# Altium PCB BatteryVCsmooth.PcbDoc
Units mm, origin at the board's own origin, x right, y up, seen from the top; angles counter-clockwise.
Board outline 95.06 x 95.03 mm, 2 copper layers (Top Layer, Bottom Layer); 23 components, 15 nets, 61 pads, 0 vias.
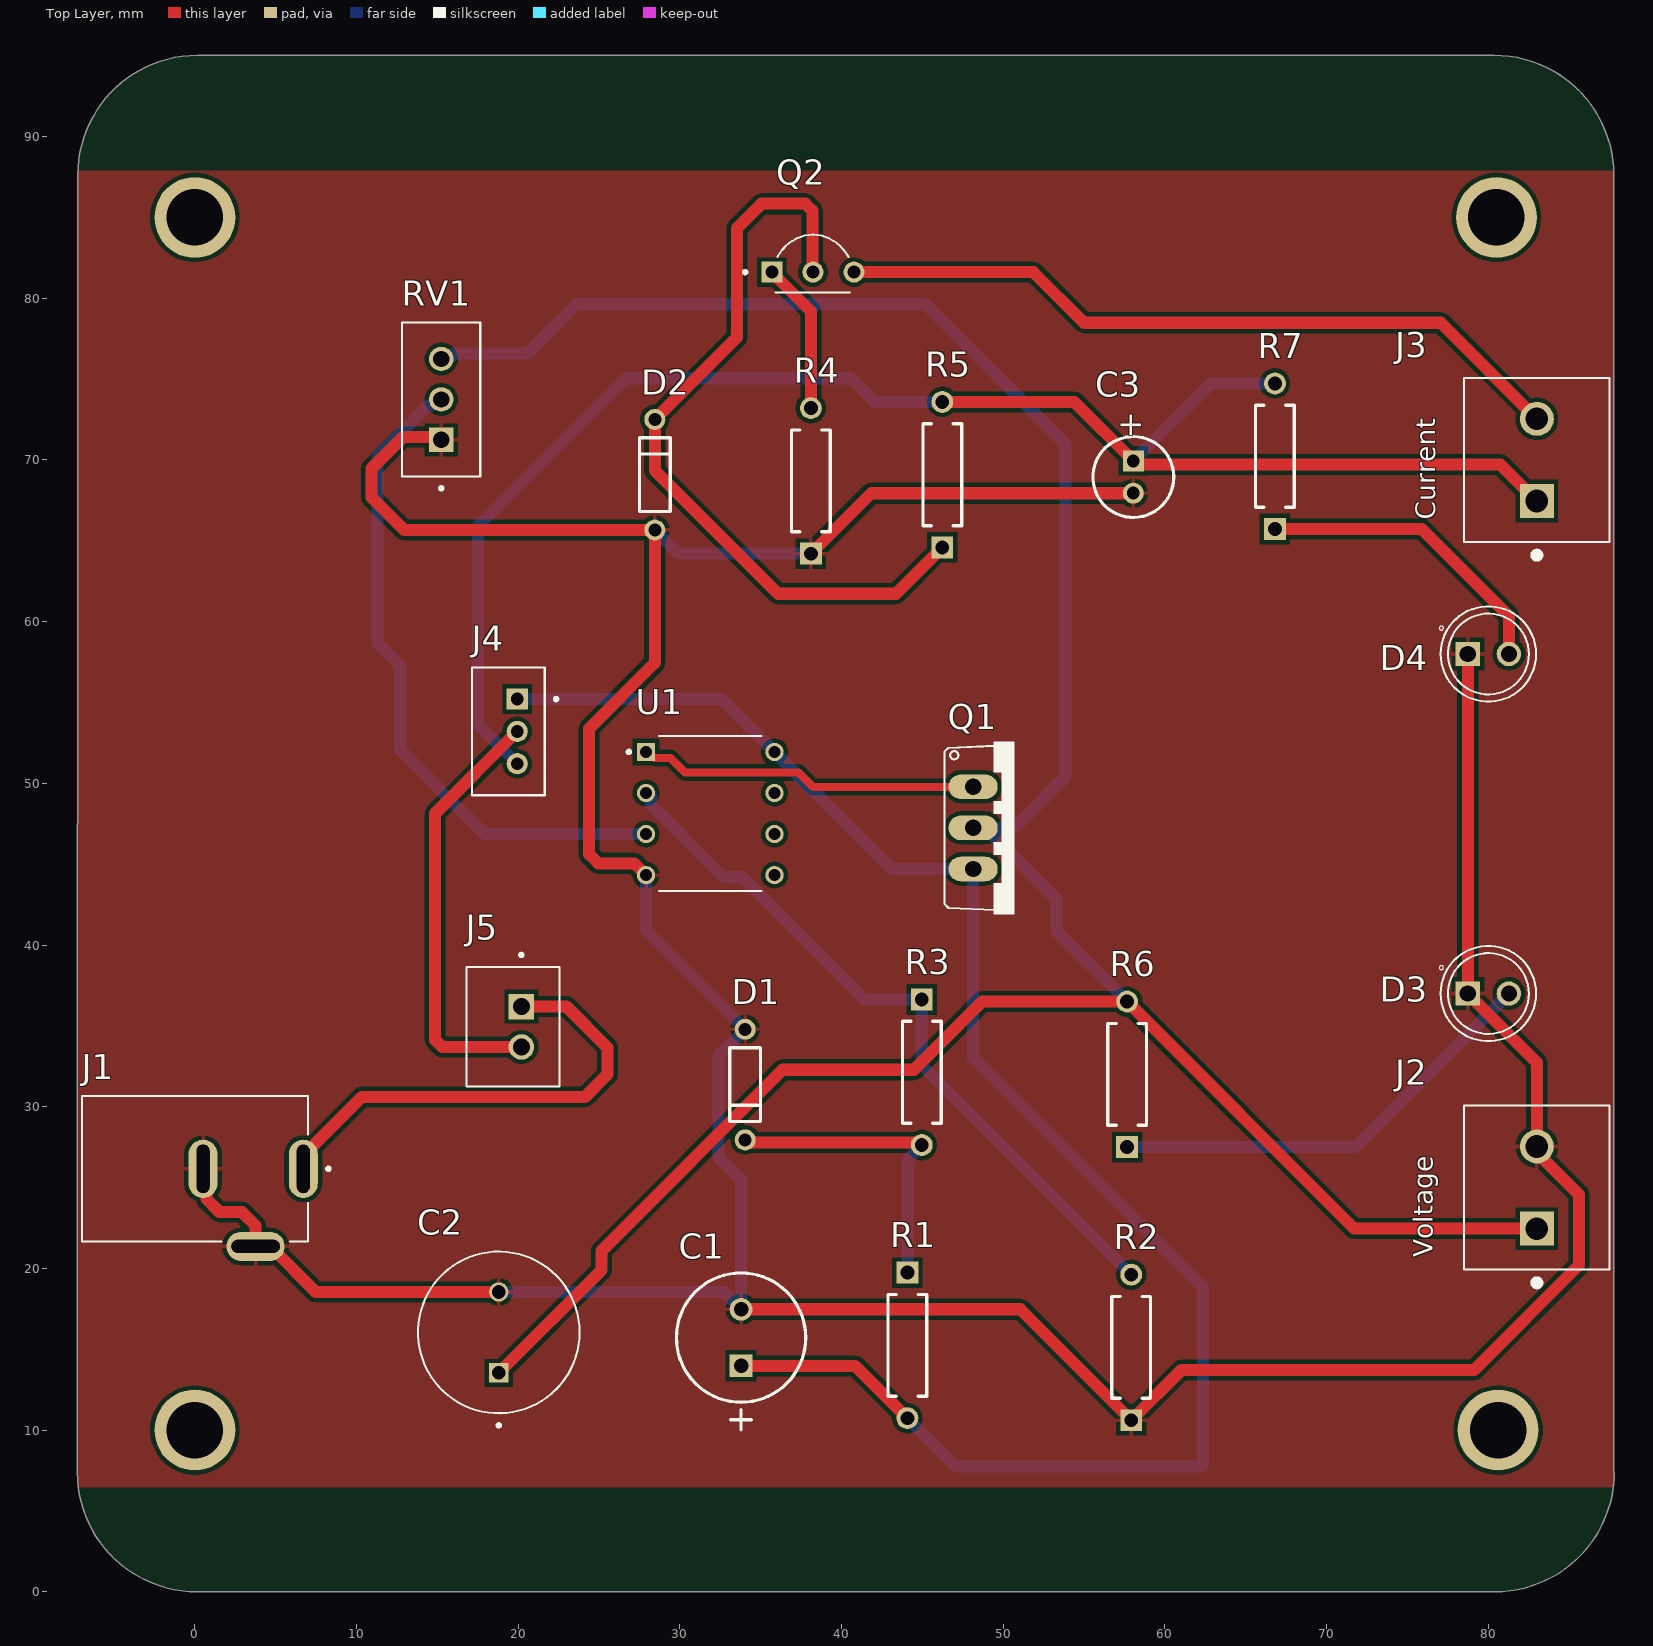
[diagram p0: Top Layer view]
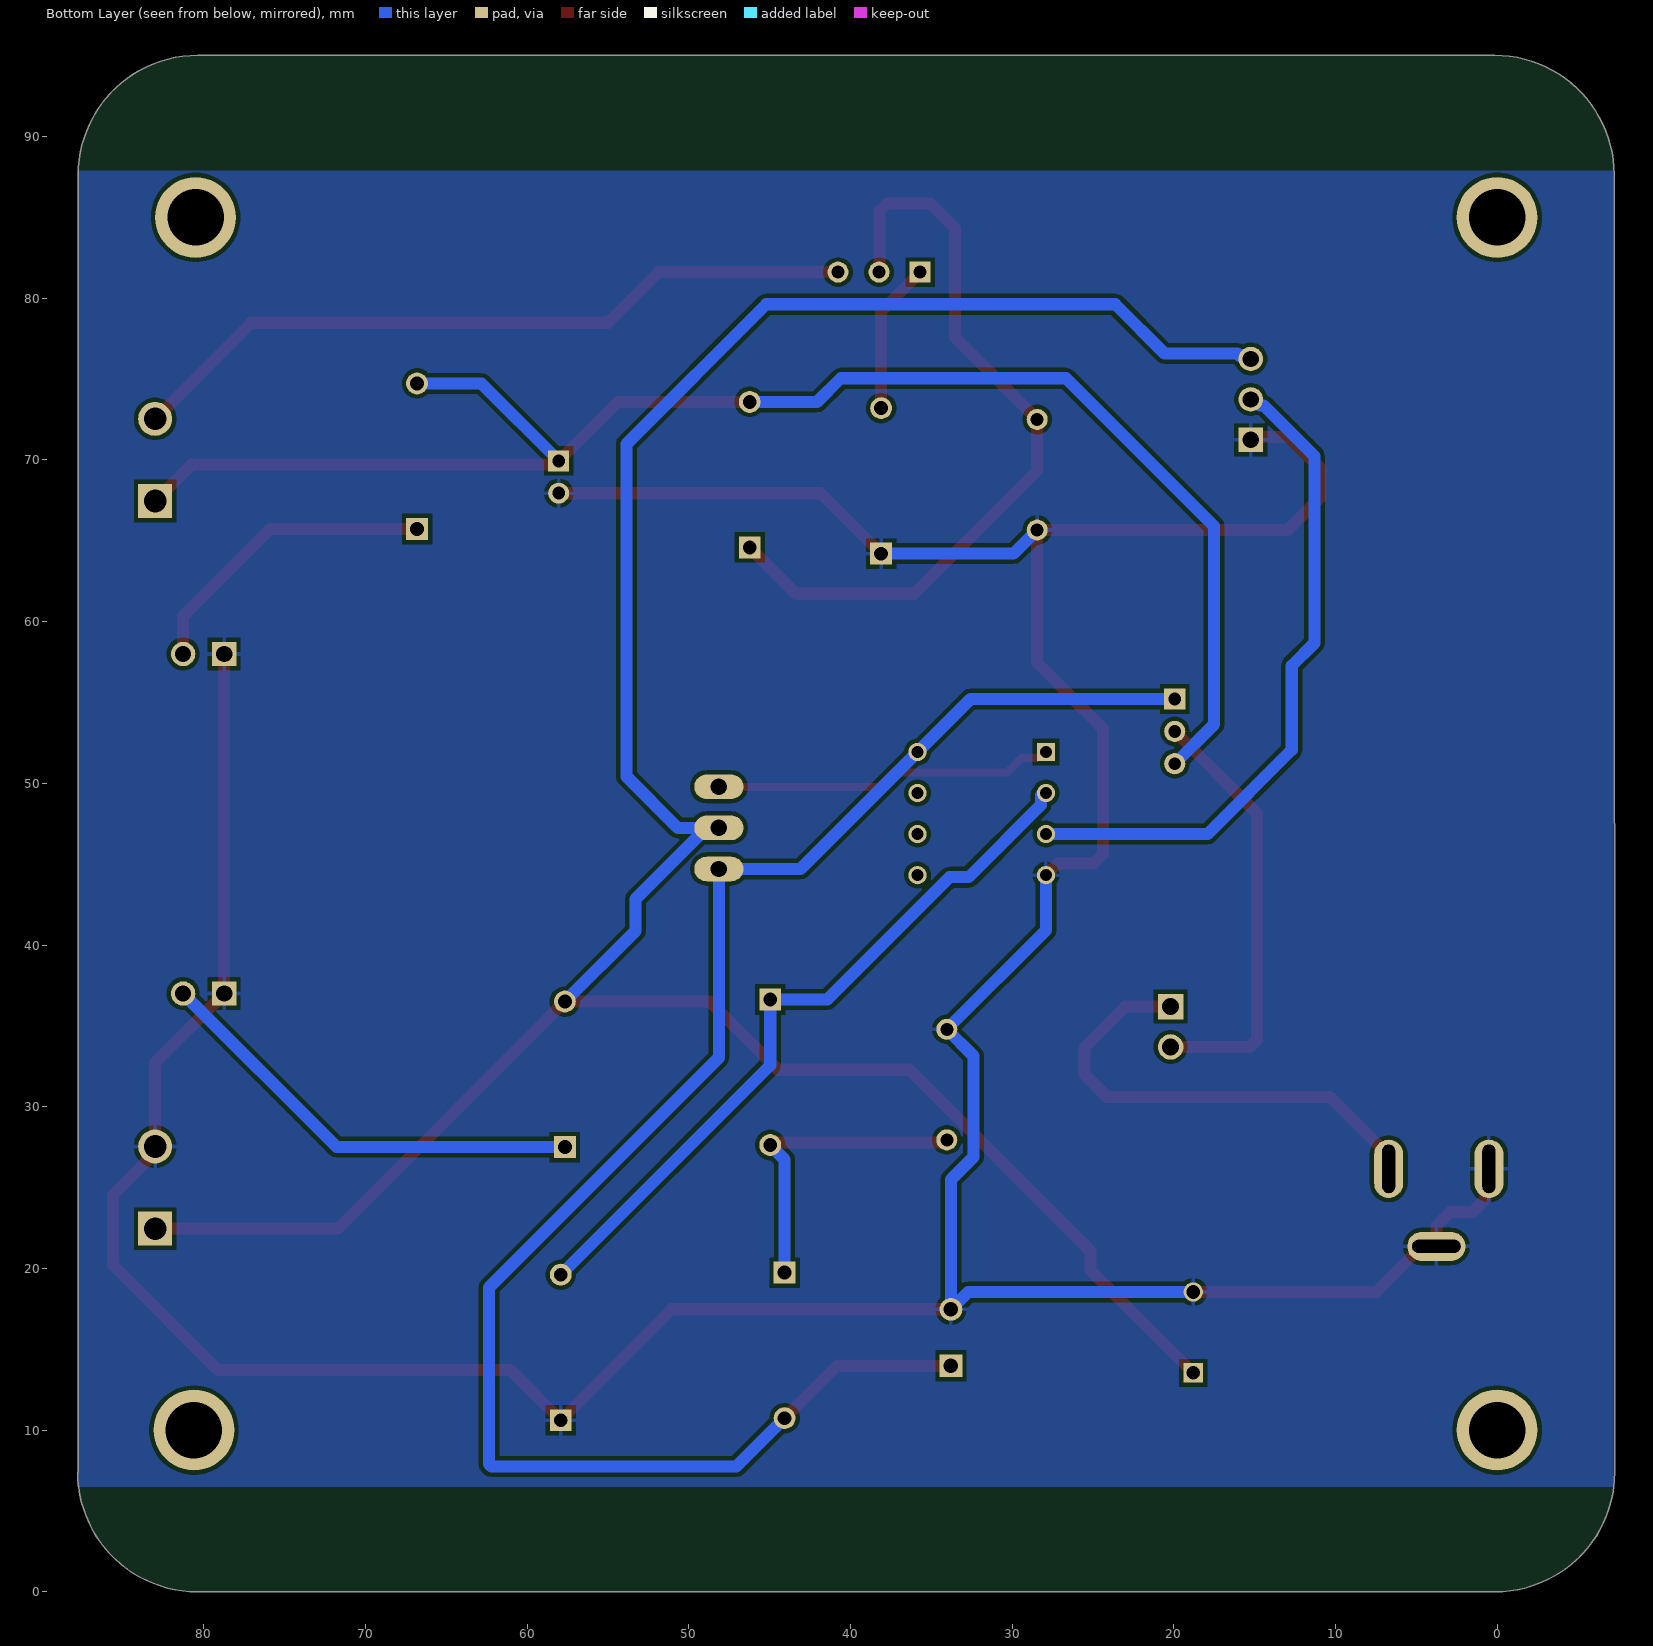
[diagram p1: Bottom Layer view, seen from below]

## Layer stack, top to bottom
Top Solder: solder mask 0.0102, Solder Resist, Dk 3.5
Top Layer: signal copper 0.0356
Dielectric 1: dielectric 0.32, FR-4, Dk 4.8
Bottom Layer: signal copper 0.0356
Bottom Solder: solder mask 0.0102, Solder Resist, Dk 3.5

## Board outline
0.127,0 cw(c0.127,7.399) -7.272,7.399 -7.239,87.63 cw(c0.16,87.63) 0.16,95.029 80.358,95.029 cw(c80.358,87.63) 87.757,87.63 87.757,7.399 87.79,7.399 cw(c80.391,7.399) 80.391,0

## Design rules (kind name [scope] priority, off if disabled: settings)
Clearance Clearance_1 [OnMid vs OnMid] p1: gap=0.254 ignorepadtopadclearanceinfootprint=FALSE sourcerule=36 cellrowname=All cellrowtype=0 cellcolname=All cellcoltype=0 innerlayers=TRUE
Clearance Clearance_2 [(ExistsOnLayer('Top Layer') Or ExistsOnLayer('Bottom Layer')) vs (ExistsOnLayer('Top Layer') Or ExistsOnLayer('Bottom Layer'))] p2: gap=0.254 ignorepadtopadclearanceinfootprint=FALSE sourcerule=36 cellrowname=All cellrowtype=0 cellcolname=All cellcoltype=0 outerlayers=TRUE
Clearance [All] p3: gap=0.254 ignorepadtopadclearanceinfootprint=FALSE ismatrix=TRUE
HoleSize [All] p1: absolutevalues=TRUE maxlimit=10 minlimit=0.025 maxpercent=80.000 minpercent=20.000
PolygonConnect [All] p1: connectstyle=Relief reliefconductorwidth=0.254 reliefentries=4 polygonreliefangle="90 Angle" airgapwidth=0.254
RoutingVias [All] p1: holewidth=0.711 width=1.27 viastyle="Through Hole" minholewidth=0.711 minwidth=1.27 maxholewidth=0.711 maxwidth=1.27
SilkToSolderMaskClearance [IsPad] p1: minsilkscreentomaskgap=0.1 clearancetoexposedcopper=TRUE
SolderMaskExpansion [All] p1: expansion=0.102 istentingtop=FALSE
Width MaxMinWidth_1 [All] p1: maxlimit=2 minlimit=0.254 preferedwidth=0.254 minimp=50.000000 maximp=50.000000 favimp=50.000000
28 further rules are at their usual default settings.

## Components (designator, comment, footprint, x,y, rotation, side; value= is the part's Value field where it differs from the comment)
C1 "ECA1HM101" CAPPR65-350-1150X800X1250 33.782,15.72 r90 top value=100µF
C2 "1000uF 16V" CAPPRD500W60D1000H2000 18.796,16.042 r90 top
C3 "ECA-1HHG010" CAPPR55-200-1100X500X1200 58.039,68.945 r270 top value=1µF
D1 "6.2V" FAIR-DO-35-2 34.036,31.369 r270 top
D2 "2.4V" FAIR-DO-35-2 28.448,69.088 r90 top
D3 "LED" LED_WP7113ID 80,37 r0 top
D4 "LED" LED_WP7113ID 80,58 r0 top
J1 "9V" CUI_PJ-035C 6.708,26.162 r270 top
J2 "Constant Voltage" TE_282841-2 83,25 r90 top
J3 "Constant Current" TE_282841-2 83,70 r90 top
J4 "Switch" JST_B3B-PH-K-S 19.389,53.213 r90 top
J5 "Power Switch" JST_B2B-XH-A(LF)(SN) 19.668,34.945 r90 top
Q1 "IRF9530N" TO220V 50.673,47.244 r270 top
Q2 "2N2222A" TO92254P470H750-3 38.227,83.947 r0 top
R1 "MFR-25FBF52-270" RESA60-630X240 44.069,15.24 r270 top value=270
R2 "MFR-25FBF52-10k" RESA60-630X240 57.912,15.113 r90 top value=10k
R3 "MFR-25FBF52-10k" RESA60-630X240 44.958,32.131 r270 top value=10k
R4 "MFR-25FBF52-46" RESA60-630X240 38.1,68.707 r90 top value=46
R5 "MFR-25FBF52-220" RESA60-630X240 46.228,69.088 r90 top value=220
R6 "MFR-25FBF52-1k" RESA60-630X240 57.658,32.004 r90 top value=1k
R7 "MFR-25FBF52-1k" RESA60-630X240 66.802,70.231 r90 top value=1K
RV1 "" TRIM_PV36W254C01B00 15.24,73.747 r90 top
U1 "LM358N/NOPB" DIP794W45P254L959H508Q8 31.877,48.133 r0 top

## Footprints (in the part's own frame and the unit in brackets; to place one, negate y for a bottom-side part, rotate by r counter-clockwise, add the part's x,y. Pads: shape width x height; smd on the part's side, far side on the other; paste and mask are expansions set on the pad)
CAPPR55-200-1100X500X1200 [mm] "THD, 2-Leads, Dia 5mm, Pin Spacing 2mm"
  rect 1.3x1.3 hole 0.8: 1(-1,0)
  round 1.3 hole 0.8: 2(1,0)
  silkscreen extent -2.5,-2.5 2.5,2.5, body extent -2.5,-2.5 2.45,2.5, height 12
CAPPR65-350-1150X800X1250 [mm] "THD, 2-Leads, Dia 8mm, Pin Spacing 3.5mm"
  rect 1.4x1.4 hole 0.9: 1(-1.75,0)
  round 1.4 hole 0.9: 2(1.75,0)
  silkscreen extent -5.71,-4 4,4, body extent -4,-4 3.95,4, height 12.5
CAPPRD500W60D1000H2000 [mm]
  round 1.2 hole 0.85: N(2.5,0)
  rect 1.2x1.2 hole 0.85: P(-2.5,0)
  silkscreen extent -5.85,-5 5,5, body extent -5,-5 5,5, height 20
CUI_PJ-035C [mm]
  oval 3.6x1.8 hole 0.8 slot 3 at 0 deg: 1(0,0) 2(0,-6.2)
  oval 1.8x3.6 hole 0.8 slot 3 at 90 deg: 3(4.8,-2.95)
  silkscreen extent -4.5,-13.7 4.5,1.65
DIP794W45P254L959H508Q8 [mm]
  rect 1.13x1.13 / inner round 1.13 / far side rect 1.13x1.13 hole 0.74: 1(-3.97,3.81)
  round 1.13 hole 0.74: 2(-3.97,1.27) 3(-3.97,-1.27) 4(-3.97,-3.81) 5(3.97,-3.81) 6(3.97,-1.27) 7(3.97,1.27) 8(3.97,3.81)
  silkscreen extent -5.13,-4.79 3.17,4.79, body extent -3.81,-4.88 3.81,4.88, height 4.96
FAIR-DO-35-2 [mm] "TH, 2-Leads, Dia 1.91mm"
  round 1.3 hole 0.8: 1(-3.42,0) 2(3.42,0)
  silkscreen extent -2.28,-0.95 2.28,0.95, body extent -3.7,-0.95 3.7,0.95, height 1.91
JST_B2B-XH-A(LF)(SN) [mm]
  rect 1.575x1.575 / inner round 1.575 / far side rect 1.575x1.575 hole 1.05: 1(1.25,-0.525)
  round 1.575 hole 1.05: 2(-1.25,-0.525)
  silkscreen extent -3.7,-2.88 4.54,2.88, body extent -3.7,-2.88 3.7,2.88, height 7
JST_B3B-PH-K-S [mm]
  rect 1.308x1.308 / inner round 1.308 / far side rect 1.308x1.308 hole 0.8: 1(2,-0.55)
  round 1.308 hole 0.8: 2(0,-0.55) 3(-2,-0.55)
  silkscreen extent -3.95,-3.05 3.95,2.25
LED_WP7113ID [mm]
  round 1.508 hole 1: A(1.27,0)
  rect 1.508x1.508 / inner round 1.508 / far side rect 1.508x1.508 hole 1: C(-1.27,0)
  silkscreen extent -3.03,-2.95 2.95,2.95, body extent -2.5,-2.95 2.95,2.95, height 9.6
RESA60-630X240 [mm] "Axial Resistor, 2-Leads, Dia 2.4mm, Body Length 6.3mm"
  rect 1.35x1.35 hole 0.85: 1(-4.5,0)
  round 1.35 hole 0.85: 2(4.5,0)
  silkscreen extent -3.15,-1.2 3.15,1.2, body extent -4.77,-1.19 4.77,1.2, height 2.4
TE_282841-2 [mm]
  rect 2.1x2.1 / inner round 2.1 / far side rect 2.1x2.1 hole 1.4: 1(-2.54,0)
  round 2.1 hole 1.4: 2(2.54,0)
  silkscreen extent -6.09,-4.5 5.08,4.5, body extent -5.08,0 5.58,9, height 15.2
TO220V [mil]
  oval 60x120 hole 40: 1(-100,-100) 2(0,-100) 3(100,-100)
  silkscreen extent -210,-170 210,0, body extent -105,-56 305,120, height 760
TO92254P470H750-3 [mm]
  rect 1.298x1.298 / inner round 1.298 / far side rect 1.298x1.298 hole 0.79: 1(-2.54,-2.33)
  round 1.298 hole 0.79: 2(0,-2.33) 3(2.54,-2.33)
  silkscreen extent -4.29,-3.6 2.3,0, body extent -2.74,-4.6 2.74,12.5, height 2.3
TRIM_PV36W254C01B00 [mm]
  rect 1.508x1.508 / inner round 1.508 / far side rect 1.508x1.508 hole 1: 1(-2.5,0)
  round 1.508 hole 1: 2(0,0) 3(2.5,0)
  silkscreen extent -5.6,-2.41 4.76,2.42, body extent -4.76,-2.41 4.76,2.42, height 11.55

## Part data
C1: library part CMP-001-00026-7, "Aluminum Electrolytic Capacitor, 100 uF, +/- 20%, 50 V, -40 to 85 degC, 2-Pin THD, RoHS, Bulk", Capacitor Type=Electrolytic, Case/Package=Radial, Manufacturer=Panasonic, Max Operating Temperature=85°C, Min Operating Temperature=-40°C, Package Description="2-Pin Radial Lead, Dia 8 mm, Height 12.5 mm", Package Quantity=200, Package Reference=CAPPR65-350-1150X800X1250, Ripple Current=250mA, Tolerance=20%, Voltage Rating=50V, Datasheet URL=https://industrial.panasonic.com/cdbs/www-data/pdf/RDF0000/ABA0000C1218.pdf, Datasheet Version="Rev. 05, 10/2016", Diameter=8mm, Lead Pitch=3.5mm, Manufacturer URL=http://www.panasonic.com/, Mounting Technology=TH, Packaging=Bulk, Pins=2, Ripple Current (AC)=250mA, RoHS Compliant=True
C2: library part EEUEB1C102B, "1000F 16V Aluminum Electrolytic Capacitors Radial, Can 10000 Hrs @ 105C", Package="RADIAL-2 Panasonic", Availability="In Stock", Check_prices=https://www.snapeda.com/parts/EEU-EB1C102B/Panasonic/view-part/2309636/?ref=eda, MF=Panasonic, MP=EEU-EB1C102B, Price=None, Purchase-URL=https://pricing.snapeda.com/search/part/EEU-EB1C102B/?ref=eda, SnapEDA_Link=https://www.snapeda.com/parts/EEU-EB1C102B/Panasonic/view-part/2309636/?ref=snap
C3: library part CMP-001-00024-7, "Aluminum Electrolytic Capacitor, 1 uF, +/- 20%, 50 V, -55 to 105 degC, 2-Pin THD, RoHS, Bulk", Capacitor Type=Electrolytic, Case/Package=Radial, Manufacturer=Panasonic, Max Operating Temperature=105°C, Min Operating Temperature=-55°C, Package Description="2-Pin Radial Lead, Dia 5 mm, Height 12 mm", Package Quantity=200, Package Reference=CAPPR55-200-1100X500X1200, Ripple Current=10mA, Tolerance=20%, Voltage Rating=50V, Datasheet URL=https://datasheet.ciiva.com/7275/94060-7275472.pdf, Datasheet Version=Mar-05, Diameter=5mm, Lead Pitch=2mm, Manufacturer URL=http://www.panasonic.com/, Mounting Technology=TH, Packaging=Bulk, Pins=2, Ripple Current (AC)=10mA, RoHS Compliant=True
D1: library part CMP-004-00021-2, "Zener Diode, 6.1 V, 5 mA, -65 to 200 degC, 2-Pin DO-35, RoHS, Bulk", Case/Package=DO-35-2, Forward Voltage=1.5V, Manufacturer="Fairchild Semiconductor", Max Operating Temperature=200°C, Min Operating Temperature=-65°C, Package Description="2-Pin Through Hole Diode, Dia 1.72 mm, Body Length 3.805 mm", Package Quantity=1000, Power=500mW, Tolerance=6%, Datasheet URL=https://www.fairchildsemi.com/datasheets/BZ/BZX79C3V6.pdf, Datasheet Version="Rev. C1, 07/2007", Impedance=90Ohm, Manufacturer URL=https://www.fairchildsemi.com/, Mounting Technology=TH, Package Reference=DO-35-2, Package URL=https://www.fairchildsemi.com/package-drawings/DO/DO35A.pdf, Packaging=Bulk, Pins=2, RoHS Compliant=True
D2: library part CMP-004-00021-2, "Zener Diode, 2.4 V, 5 mA, -65 to 200 degC, 2-Pin DO-35, RoHS, Bulk", Case/Package=DO-35-2, Forward Voltage=1.5V, Manufacturer="Fairchild Semiconductor", Max Operating Temperature=200°C, Min Operating Temperature=-65°C, Package Description="2-Pin Through Hole Diode, Dia 1.72 mm, Body Length 3.805 mm", Package Quantity=1000, Power=500mW, Tolerance=6%, Datasheet URL=https://www.fairchildsemi.com/datasheets/BZ/BZX79C3V6.pdf, Datasheet Version="Rev. C1, 07/2007", Impedance=90Ohm, Manufacturer URL=https://www.fairchildsemi.com/, Mounting Technology=TH, Package Reference=DO-35-2, Package URL=https://www.fairchildsemi.com/package-drawings/DO/DO35A.pdf, Packaging=Bulk, Pins=2, RoHS Compliant=True
D3 D4: library part WP7113ID, "Red 617nm LED Indication - Discrete 2V Radial", Package="Radial Kingbright", Availability="In Stock", Check_prices=https://www.snapeda.com/parts/WP7113ID/Kingbright/view-part/?ref=eda, MF=Kingbright, MP=WP7113ID, Price=None, Purchase-URL=https://pricing.snapeda.com/search/part/WP7113ID/?ref=eda, SnapEDA_Link=https://www.snapeda.com/parts/WP7113ID/Kingbright/view-part/?ref=snap
J1: library part PJ-035C, Package=None, Availability=Unavailable, MF="{'manufacturer': u'CUI Devices'}", MP=PJ-035C, Price=None
J2 J3: library part 282841-2, "Conn Terminal Block 2 POS 5.08mm Solder ST Thru-Hole 17.5A/Contact", Package=None, Availability="In Stock", Check_prices=https://www.snapeda.com/parts/282841-2/TE+Connectivity+AMP+Connectors/view-part/?ref=eda, EU_RoHS_Compliance="Compliant with Exemptions", MF="TE Connectivity", MP=282841-2, Price=None, Purchase-URL=https://pricing.snapeda.com/search/part/282841-2/?ref=eda, SnapEDA_Link=https://www.snapeda.com/parts/282841-2/TE+Connectivity+AMP+Connectors/view-part/?ref=snap
J4: library part B3B-PH-K-S, Package=None, Availability=Unavailable, MF="{'manufacturer': u'JST Sales America Inc.'}", MP=B3B-PH-K-S, Price=None
J5: library part B2B-XH-A(LF)(SN), "Connector Header Through Hole 2 position 0.098 (2.50mm)", Package=None, Check_prices=https://www.snapeda.com/parts/B2B-XH-A(LF)(SN)/JST+Sales+America+Inc./view-part/?ref=eda, MF="JST Sales America Inc.", MP=B2B-XH-A(LF)(SN), SnapEDA_Link=https://www.snapeda.com/parts/B2B-XH-A(LF)(SN)/JST+Sales+America+Inc./view-part/?ref=snap
Q1: library part IRF9530NPBF, "Canal P 100 V 14A (Tc) 79W (Tc) Orificio pasante TO-220AB", Package="TO-220 Infineon", Check_prices=https://www.snapeda.com/parts/IRF9530NPBF/Infineon+Technologies/view-part/?ref=eda, Digi-Key_Part_Number=IRF9530NPBF-ND, MF=Infineon, MP=IRF9530NPBF, Purchase-URL=https://pricing.snapeda.com/search/part/IRF9530NPBF/?ref=eda, SnapEDA_Link=https://www.snapeda.com/parts/IRF9530NPBF/Infineon+Technologies/view-part/?ref=snap
Q2: "Bipolar (BJT) Transistor NPN 40 V 600 mA 250MHz 625 mW Through Hole TO-92", Package="TO-92-3 Diotec", Availability="In Stock", Check_prices=https://www.snapeda.com/parts/2N2222A/Diotec/view-part/?ref=eda, MF="Diotec Semiconductor", MP=2N2222A, Price=None, Purchase-URL=https://pricing.snapeda.com/search/part/2N2222A/?ref=eda, SnapEDA_Link=https://www.snapeda.com/parts/2N2222A/Diotec/view-part/?ref=snap
R1: library part CMP-009-00045-4, "Axial Resistor, 270Ohm, +/- 1%, 0.25 W, -55 to 155 degC, 2-Pin THD, RoHS, Bulk", Case/Package=Axial, Manufacturer=Yageo, Max Operating Temperature=155°C, Min Operating Temperature=-55°C, Package Description="2-Pin Axial Lead, Dia 2.4 mm, Body Length 6.3 mm", Package Quantity=200, Package Reference=MFR-25, Power=250mW, Tolerance=1%, Voltage Rating=250V, Datasheet URL=http://www.yageo.com/documents/recent/Yageo%20LR_MFR_2013.pdf, Datasheet Version=Apr-13, Manufacturer URL=http://www.yageo.com/, Mounting Technology=TH, Packaging=Bulk, RoHS Compliant=True
R2 R3: library part CMP-009-00045-4, "Axial Resistor, 10kOhm, +/- 1%, 0.25 W, -55 to 155 degC, 2-Pin THD, RoHS, Bulk", Case/Package=Axial, Manufacturer=Yageo, Max Operating Temperature=155°C, Min Operating Temperature=-55°C, Package Description="2-Pin Axial Lead, Dia 2.4 mm, Body Length 6.3 mm", Package Quantity=200, Package Reference=MFR-25, Power=250mW, Tolerance=1%, Voltage Rating=250V, Datasheet URL=http://www.yageo.com/documents/recent/Yageo%20LR_MFR_2013.pdf, Datasheet Version=Apr-13, Manufacturer URL=http://www.yageo.com/, Mounting Technology=TH, Packaging=Bulk, RoHS Compliant=True
R4: library part CMP-009-00045-4, "Axial Resistor, 46Ohm, +/- 1%, 0.25 W, -55 to 155 degC, 2-Pin THD, RoHS, Bulk", Case/Package=Axial, Manufacturer=Yageo, Max Operating Temperature=155°C, Min Operating Temperature=-55°C, Package Description="2-Pin Axial Lead, Dia 2.4 mm, Body Length 6.3 mm", Package Quantity=200, Package Reference=MFR-25, Power=250mW, Tolerance=1%, Voltage Rating=250V, Datasheet URL=http://www.yageo.com/documents/recent/Yageo%20LR_MFR_2013.pdf, Datasheet Version=Apr-13, Manufacturer URL=http://www.yageo.com/, Mounting Technology=TH, Packaging=Bulk, RoHS Compliant=True
R5: library part CMP-009-00045-4, "Axial Resistor, 220Ohm, +/- 1%, 0.25 W, -55 to 155 degC, 2-Pin THD, RoHS, Bulk", Case/Package=Axial, Manufacturer=Yageo, Max Operating Temperature=155°C, Min Operating Temperature=-55°C, Package Description="2-Pin Axial Lead, Dia 2.4 mm, Body Length 6.3 mm", Package Quantity=200, Package Reference=MFR-25, Power=250mW, Tolerance=1%, Voltage Rating=250V, Datasheet URL=http://www.yageo.com/documents/recent/Yageo%20LR_MFR_2013.pdf, Datasheet Version=Apr-13, Manufacturer URL=http://www.yageo.com/, Mounting Technology=TH, Packaging=Bulk, RoHS Compliant=True
R6 R7: library part CMP-009-00045-4, "Axial Resistor, 1kOhm, +/- 1%, 0.25 W, -55 to 155 degC, 2-Pin THD, RoHS, Bulk", Case/Package=Axial, Manufacturer=Yageo, Max Operating Temperature=155°C, Min Operating Temperature=-55°C, Package Description="2-Pin Axial Lead, Dia 2.4 mm, Body Length 6.3 mm", Package Quantity=200, Package Reference=MFR-25, Power=250mW, Tolerance=1%, Voltage Rating=250V, Datasheet URL=http://www.yageo.com/documents/recent/Yageo%20LR_MFR_2013.pdf, Datasheet Version=Apr-13, Manufacturer URL=http://www.yageo.com/, Mounting Technology=TH, Packaging=Bulk, RoHS Compliant=True
RV1: library part PV36W254C01B00, "100 kOhms 0.5W, 1/2W PC Pins Through Hole Trimmer Potentiometer Cermet 25.0 Turn Top Adjustment", Package="PV36W Bourns", Check_prices=https://www.snapeda.com/parts/PV36W254C01B00/Bourns/view-part/?ref=eda, MF=Bourns, MP=PV36W254C01B00, SnapEDA_Link=https://www.snapeda.com/parts/PV36W254C01B00/Bourns/view-part/?ref=snap
U1: "General Purpose Amplifier 2 Circuit - 8-PDIP", Package="PDIP-8 ON Semiconductor", Check_prices=https://www.snapeda.com/parts/LM358N/Onsemi/view-part/?ref=eda, MF="ON Semiconductor", MP=LM358N, SnapEDA_Link=https://www.snapeda.com/parts/LM358N/Onsemi/view-part/?ref=snap

## Free pads (board coordinates)
  round 5 hole 3.5: H1(0,10) H2(80.6,10) H3(80.5,85) H4(0,85)

## Nets (pads, with @x,y where several pads share a name; then routed paths per layer and width w, separated by ;. In a path a pad name is that pad's centre, name@x,y a point inside that pad or via, vN(x,y) a via of type N, cw(c..) or ccw(c..) an arc to the next point about the centre after c; other vN are vias at no path point)
GND: C1.2 C2.N C3.2 D1.1 D2.1 D3.C D4.C J1.2 J1.3 J2.2 R2.1 R4.1 RV1.1 U1.4 | length 251.5
  Top Layer w0.75: J1.2 0.709,25.961 0.709,24.31 1.524,23.495 2.906,23.495 3.758,22.643 J1.3 4.658,21.362 7.478,18.542 C2.N ; RV1.1 15.24,71.414 12.867,71.414 10.922,69.469 10.922,67.691 12.945,65.668 D2.1 28.448,57.457 24.384,53.393 24.384,45.615 24.946,45.053 27.177,45.053 U1.4 ; C1.2 51.055,17.47 R2.1 61.015,13.716 79.121,13.716 85.598,20.193 85.598,24.572 83,27.17 J2.2 83,32.73 D3.C D4.C ; R4.1 41.838,67.945 C3.2
  Bottom Layer w0.75: C2.N 32.71,18.542 C1.2 33.782,25.493 32.385,26.89 32.385,33.138 D1.1 27.907,40.918 U1.4 ; D2.1 29.909,64.207 R4.1
NetC1_1: C1.1 J4.1 Q1.3 R1.2 U1.8 | length 106.5
  Top Layer w0.75: C1.1 40.839,13.97 R1.2
  Bottom Layer w0.75: J4.1 32.577,55.213 U1.8 43.086,44.704 Q1.3 48.133,33.044 62.357,18.82 62.357,7.896 62.208,7.747 47.062,7.747 R1.2
NetC2_P: C2.P J2.1 Q1.2 R6.2 RV1.3 | length 165.8
  Top Layer w0.75: C2.P 25.146,19.892 25.146,21.082 36.347,32.283 44.475,32.283 48.696,36.504 R6.2 71.702,22.46 J2.1
  Bottom Layer w0.75: RV1.3 15.385,76.392 15.869,76.392 16.058,76.581 20.574,76.581 23.622,79.629 45.212,79.629 53.848,70.993 53.848,50.419 50.673,47.244 Q1.2@48.895,47.244 ; Q1.2 Q1.2@48.895,47.244 ; R6.2 53.293,40.869 53.293,42.846 Q1.2@48.895,47.244
NetC3_1: C3.1 J3.1 J4.3 R5.2 R7.2 | length 98.9
  Top Layer w0.75: R5.2 54.396,73.588 C3.1 58.261,69.723 80.737,69.723 J3.1
  Bottom Layer w0.75: J4.3 17.51,53.642 17.51,65.897 26.67,75.057 40.591,75.057 42.06,73.588 R5.2 ; C3.1 62.825,74.731 R7.2
NetD1_2: D1.2 R1.1 R3.2 | length 19.3
  Top Layer w0.75: D1.2 34.195,27.79 44.799,27.79 R3.2
  Bottom Layer w0.75: R1.1 44.069,26.742 R3.2
NetD2_2: D2.2 Q2.2 R5.1 | length 48.4
  Top Layer w0.75: Q2.2@38.189,81.655 38.189,85.413 37.75,85.852 35.052,85.852 33.528,84.328 33.528,77.588 D2.2 28.448,69.342 36.068,61.722 43.362,61.722 R5.1
NetD3_A: D3.A R6.1 | length 27.5
  Bottom Layer w0.75: R6.1 71.774,27.504 D3.A
NetD4_A: D4.A R7.1 | length 19
  Top Layer w0.75: R7.1 75.874,65.731 81.27,60.335 D4.A
NetJ1_1: J1.1 J5.1 | length 29.8
  Top Layer w0.75: J1.1 6.708,26.987 10.328,30.607 24.13,30.607 25.527,32.004 25.527,33.655 22.987,36.195 J5.1
NetJ3_2: J3.2 Q2.3 | length 46
  Top Layer w0.75: Q2.3 51.86,81.617 54.991,78.486 77.054,78.486 J3.2
NetJ4_2: J4.2 J5.2 | length 26.7
  Top Layer w0.75: J4.2 14.859,48.133 14.859,34.134 15.298,33.695 J5.2
NetQ1_1: Q1.1 U1.1 | length 21
  Top Layer w0.5: U1.1@28.067,51.943 28.442,51.568 29.422,51.568 30.317,50.673 37.338,50.673 38.227,49.784 Q1.1
NetQ2_1: Q2.1 R4.2 | length 9.4
  Top Layer w0.75: Q2.1 38.1,79.204 R4.2
NetR2_2: R2.2 R3.1 U1.2 | length 44.9
  Bottom Layer w0.75: U1.2@28.067,49.403 28.211,49.259 28.211,48.67 32.684,44.196 33.869,44.196 34.308,43.757 34.308,43.752 41.429,36.631 R3.1 44.958,32.567 R2.2
NetRV1_2: RV1.2 U1.3 | length 41.7
  Bottom Layer w0.75: RV1.2 15.035,73.747 14.667,73.379 14.451,73.379 11.303,70.231 11.303,58.674 12.7,57.277 12.7,52.07 17.907,46.863 U1.3@28.067,46.863
pads on no net: U1.5 U1.6 U1.7

## Polygon pours and split planes (outlines as drawn)
GND on Bottom Layer "GND_L02_P002" (solid, pour order 2): -7.181,87.901 -7.181,6.494 87.815,6.494 87.815,87.901
GND on Top Layer "GND_L01_P000" (solid, pour order 0): -7.239,87.884 -7.239,6.477 87.757,6.477 87.757,87.884

## Silkscreen, mask and mechanical layers (free items; w line width, h text height)
Top Overlay:
  text "Current" at 76.708,66.294 h1.2 r90
  text "Voltage" at 76.562,20.701 h1.2 r90

## Text inside footprints (layer, text, board x,y; h text height)
C3: Top Overlay "+" at 57.277,73.009 h1.5 r270